# Altium PCB 最小51PCB.PcbDoc
Units mm, origin at the board's own origin, x right, y up, seen from the top; angles counter-clockwise.
Board outline 83.11 x 44.78 mm, 2 copper layers (Top Layer, Bottom Layer); 22 components, 45 nets, 131 pads, 0 vias.
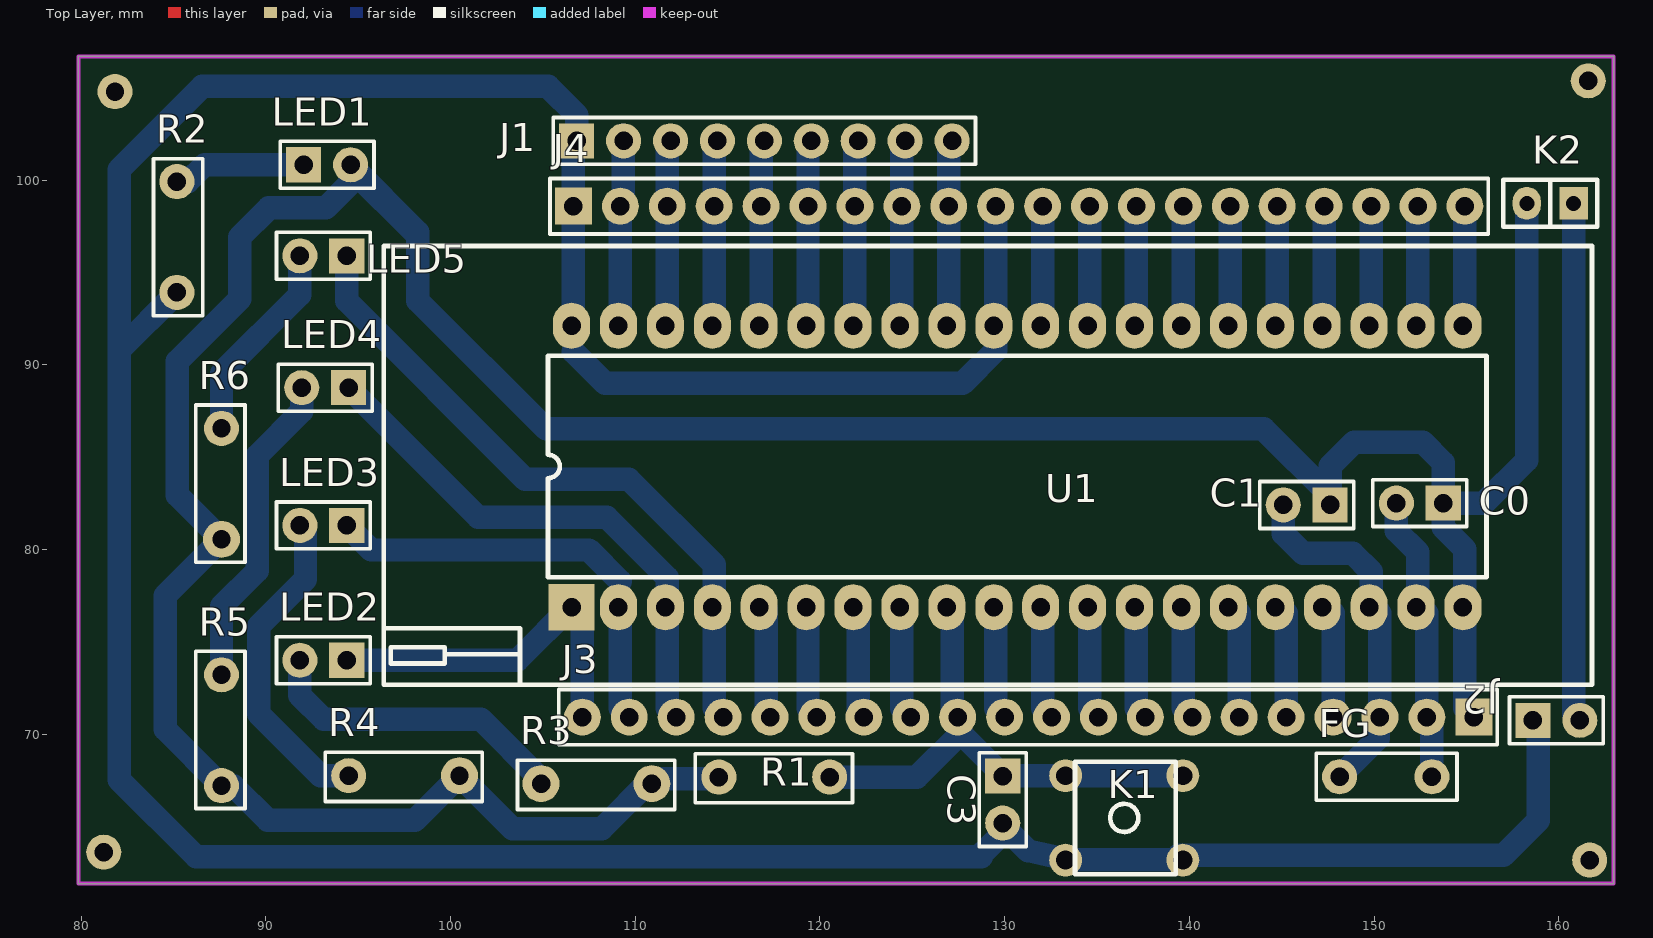
[diagram p0: Top Layer view]
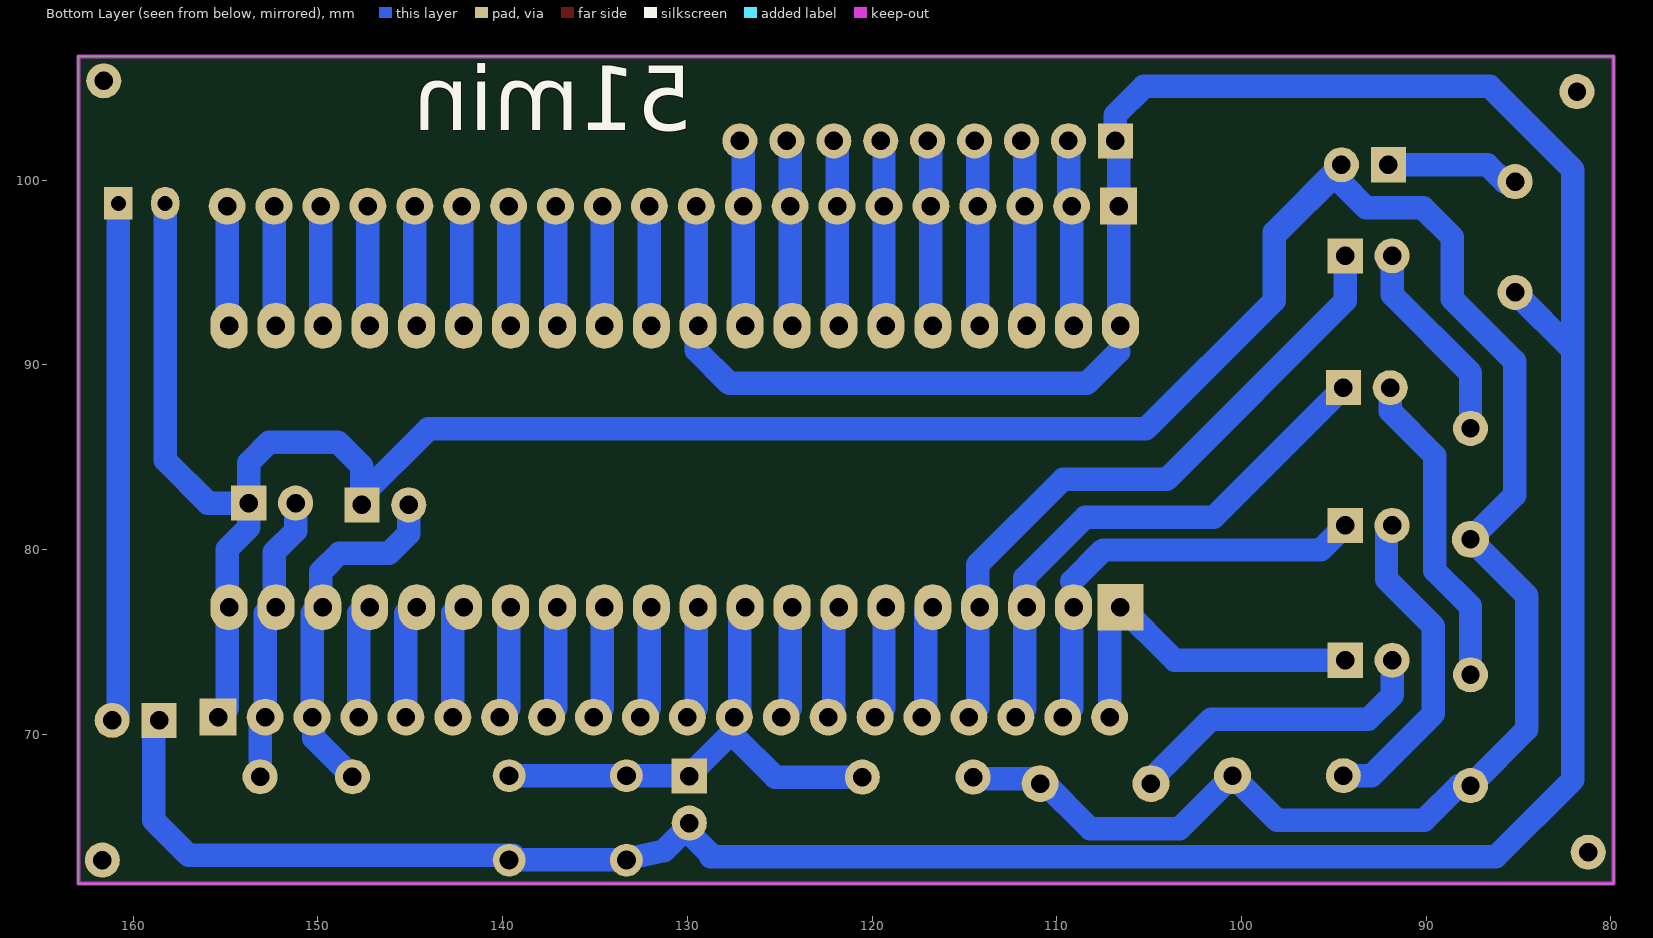
[diagram p1: Bottom Layer view, seen from below]

## Layer stack, top to bottom
Top Solder: solder mask 0.0102, Solder Resist, Dk 3.5
Top Layer: signal copper 0.0356
Dielectric 1: dielectric 0.32, FR-4, Dk 4.8
Bottom Layer: signal copper 0.0356
Bottom Solder: solder mask 0.0102, Solder Resist, Dk 3.5

## Board outline
79.858,61.925 79.858,106.705 162.966,106.705 162.966,61.925

## Design rules (kind name [scope] priority, off if disabled: settings)
Clearance [All] p1: gap=0.254 ignorepadtopadclearanceinfootprint=FALSE except(0: Arc-Hole Track-Hole SMDPad-Hole THPad-Hole Via-Hole Fill-Hole Poly-Hole Region-Hole Text-Hole)
PolygonConnect [All] p1: connectstyle=Relief reliefconductorwidth=0.254 reliefentries=4 polygonreliefangle="90 Angle" airgapwidth=0.254
RoutingVias [All] p1: holewidth=0.711 width=1.27 viastyle="Through Hole" minholewidth=0.711 minwidth=1.27 maxholewidth=0.711 maxwidth=1.27
SolderMaskExpansion [All] p1: expansion=0.102 istentingtop=FALSE
Width [All] p1: maxlimit=1.27 minlimit=1.27 preferedwidth=1.27 minimp=50.000000 maximp=50.000000 favimp=50.000000
30 further rules are at their usual default settings.

## Components (designator, comment, footprint, x,y, rotation, side; value= is the part's Value field where it differs from the comment)
C0 "30pf" CAP 153.746,82.525 r180 top
C1 "30pf" CAP 147.625,82.423 r180 top
C3 "10uf" CAP 129.896,67.742 r270 top
FG "11.0592MHz" JINGZHEN 148.134,67.709 r0 top
J1 "PIN9" PIN9 106.832,102.133 r0 top
J2 "PIN2" CAP 158.598,70.764 r0 top
J3 "PIN20" PIN20_2.54 131.268,70.935 r180 top
J4 "PIN20" PIN20_2.54 130.786,98.595 r0 top
K1 "KEY" AN66 136.474,65.481 r90 top
K2 "KEY" SIP2 160.858,98.806 r180 top
LED1 "LED" CAP 92.05,100.838 r0 top
LED2 "LED" CAP 94.386,74.016 r180 top
LED3 "LED" CAP 94.386,81.314 r180 top
LED4 "LED" CAP 94.488,88.773 r180 top
LED5 "LED" CAP 94.386,95.91 r180 top
R1 "4.7k" RES#1 114.529,67.691 r0 top
R2 "4.7k" RES#1 85.192,93.929 r90 top
R3 "1k" RES#2 104.902,67.335 r0 top
R4 "1k" RES#3 94.488,67.767 r0 top
R5 "1k" RES#1 87.605,73.228 r270 top
R6 "1k" RES#3 87.605,86.563 r270 top
U1 "STC89C52" ZIF40 130.683,84.506 r90 top

## Footprints (in the part's own frame and the unit in brackets; to place one, negate y for a bottom-side part, rotate by r counter-clockwise, add the part's x,y. Pads: shape width x height; smd on the part's side, far side on the other; paste and mask are expansions set on the pad)
AN66 [mil]
  round 70 hole 40: 1(90,125) 1(90,-125) 2(-90,125) 2(-90,-125)
  silkscreen extent -120,-110 120,105, body extent -120,-152 116,152, height 201
CAP [mm]
  rect 1.9x1.9 hole 1: 1(0,0)
  round 1.9 hole 1: 2(2.54,0)
  silkscreen extent -1.27,-1.27 3.81,1.27
JINGZHEN [mm]
  round 1.9 hole 1: 1(0,0) 2(5,0)
  silkscreen extent -1.27,-1.27 6.35,1.27
PIN9 [mm]
  rect 1.9x1.9 hole 1: 1(0,0)
  round 1.9 hole 1: 2(2.54,0) 3(5.08,0) 4(7.62,0) 5(10.16,0) 6(12.7,0) 7(15.24,0) 8(17.78,0) 9(20.32,0)
  silkscreen extent -1.27,-1.27 21.59,1.27
PIN20_2.54 [mm]
  rect 2x2 hole 1: 1(-24.13,0)
  round 2 hole 1: 2(-21.59,0) 3(-19.05,0) 4(-16.51,0) 5(-13.97,0) 6(-11.43,0) 7(-8.89,0) 8(-6.35,0) 9(-3.81,0) 10(-1.27,0) 11(1.27,0) 12(3.81,0) 13(6.35,0) 14(8.89,0) 15(11.43,0) 16(13.97,0) 17(16.51,0) 18(19.05,0) 19(21.59,0) 20(24.13,0)
  silkscreen extent -25.4,-1.5 25.4,1.5, body extent -25.4,-1.24 25.4,1.25, height 8.54
RES#1 [mm]
  round 1.9 hole 1: 1(0,0) 2(6,0)
  silkscreen extent -1.27,-1.4 7.24,1.27
RES#2 [mm]
  round 2 hole 1: 1(0,0) 2(6,0)
  silkscreen extent -1.27,-1.4 7.24,1.27
RES#3 [mm]
  round 1.9 hole 1: 1(0,0)
  round 2 hole 1: 2(6,0)
  silkscreen extent -1.27,-1.4 7.24,1.27
SIP2 [mil]
  rect 60x70 hole 32: 1(2,2)
  oval 60x70 hole 32: 2(102,2)
  silkscreen extent -48,-48 152,52
ZIF40 [mm]
  rect 2.5x2.5 hole 1: 1(-7.62,24.13)
  oval 2.5x2 hole 1: 2(-7.62,21.59) 3(-7.62,19.05) 4(-7.62,16.51) 5(-7.62,13.97) 6(-7.62,11.43) 7(-7.62,8.89) 8(-7.62,6.35) 9(-7.62,3.81) 10(-7.62,1.27) 11(-7.62,-1.27) 12(-7.62,-3.81) 13(-7.62,-6.35) 14(-7.62,-8.89) 15(-7.62,-11.43) 16(-7.62,-13.97) 17(-7.62,-16.51) 18(-7.62,-19.05) 19(-7.62,-21.59) 20(-7.62,-24.13) 21(7.62,-24.13) 22(7.62,-21.59) 23(7.62,-19.05) 24(7.62,-16.51) 25(7.62,-13.97) 26(7.62,-11.43) 27(7.62,-8.89) 28(7.62,-6.35) 29(7.62,-3.81) 30(7.62,-1.27) 31(7.62,1.27) 32(7.62,3.81) 33(7.62,6.35) 34(7.62,8.89) 35(7.62,11.43) 36(7.62,13.97) 37(7.62,16.51) 38(7.62,19.05) 39(7.62,21.59) 40(7.62,24.13)
  silkscreen extent -11.81,-31.12 11.94,34.29, body extent -11.87,-31.2 12,45.99, height 11

## Part data
C0 C1: library part CAP
C3: library part CAP_JIXING
FG: library part JINGZHEN
R1 R2 R3 R4 R5 R6: library part R

## Free pads (board coordinates)
  round 1.9 hole 1: 0(81.839,104.8) 1(81.229,63.627) 2(161.595,105.385) 3(161.671,63.195)

## Nets (pads, with @x,y where several pads share a name; then routed paths per layer and width w, separated by ;. In a path a pad name is that pad's centre, name@x,y a point inside that pad or via, vN(x,y) a via of type N, cw(c..) or ccw(c..) an arc to the next point about the centre after c; other vN are vias at no path point)
GND: C0.1 C1.1 J3.1 K2.2 LED1.2 R1.1 R3.2 R4.2 R5.2 R6.2 U1.20 | length 184.6
  Bottom Layer w1.27: LED1.2 98.234,97.193 98.234,96.99 ; R1.1@114.427,67.589 110.877,67.589 108.184,64.897 103.358,64.897 R4.2 98.075,65.354 90.119,65.354 88.245,67.228 R5.2 84.557,70.276 84.557,77.515 R6.2 85.217,82.951 85.217,90.195 88.595,93.574 88.595,96.926 90.17,98.501 93.243,98.501 94.59,99.847 94.59,100.635 98.234,96.99 ; R1.1@114.529,67.412 R1.1 ; C1.1 C1.1@147.625,82.931 ; J3.1 154.916,71.417 154.916,80.034 153.746,81.204 C0.1 ; K2.2 158.267,84.836 155.956,82.525 C0.1 ; 98.234,96.99 98.234,93.485 105.181,86.538 144.018,86.538 C1.1@147.625,82.931 ; C1.1@147.625,82.931 147.625,84.531 148.92,85.827 152.629,85.827 153.746,84.709 C0.1
NetJ2_2: J2.2 K2.1 | length 28.1
  Bottom Layer w1.27: K2.1 160.807,71.095 J2.2
NetJ3_4: J3.4 U1.17 | length 6.3
  Bottom Layer w1.27: U1.17@147.296,77.056 147.778,76.574 J3.4
NetJ3_5: J3.5 U1.16 | length 6.3
  Bottom Layer w1.27: U1.16@144.756,77.056 145.238,76.574 J3.5
NetJ3_6: J3.6 U1.15 | length 6.3
  Bottom Layer w1.27: U1.15@142.216,77.056 142.698,76.574 J3.6
NetJ3_7: J3.7 U1.14 | length 6.3
  Bottom Layer w1.27: U1.14@139.676,77.056 139.676,71.417 J3.7
NetJ3_8: J3.8 U1.13 | length 6.3
  Bottom Layer w1.27: U1.13@137.136,77.056 137.136,71.417 J3.8
NetJ3_9: J3.9 U1.12 | length 6.3
  Bottom Layer w1.27: U1.12@134.596,77.056 134.596,71.417 J3.9
NetJ3_10: J3.10 U1.11 | length 6.3
  Bottom Layer w1.27: U1.11@132.056,77.056 132.056,71.417 J3.10
NetJ3_11: J3.11 U1.10 | length 6.3
  Bottom Layer w1.27: U1.10@129.516,77.056 129.516,71.417 J3.11
NetJ3_13: J3.13 U1.8 | length 6.3
  Bottom Layer w1.27: U1.8@124.436,77.056 124.436,71.417 J3.13
NetJ3_14: J3.14 U1.7 | length 6.3
  Bottom Layer w1.27: U1.7@121.896,77.056 122.072,76.88 122.072,71.241 J3.14
NetJ3_15: J3.15 U1.6 | length 6.3
  Bottom Layer w1.27: U1.6@119.356,77.056 119.356,71.417 J3.15
NetJ3_16: J3.16 U1.5 | length 6.3
  Bottom Layer w1.27: U1.5@116.816,77.056 117.094,76.778 117.094,71.139 J3.16
NetJ4_11: J4.11 U1.30 | length 6.3
  Bottom Layer w1.27: U1.30@132.056,92.296 J4.11
NetJ4_12: J4.12 U1.29 | length 6.3
  Bottom Layer w1.27: U1.29@134.596,92.296 J4.12
NetJ4_13: J4.13 U1.28 | length 6.3
  Bottom Layer w1.27: U1.28@137.136,92.296 J4.13
NetJ4_14: J4.14 U1.27 | length 6.3
  Bottom Layer w1.27: U1.27@139.676,92.296 J4.14
NetJ4_15: J4.15 U1.26 | length 6.3
  Bottom Layer w1.27: U1.26@142.216,92.296 J4.15
NetJ4_16: J4.16 U1.25 | length 6.3
  Bottom Layer w1.27: U1.25@144.756,92.296 J4.16
NetJ4_17: J4.17 U1.24 | length 6.3
  Bottom Layer w1.27: U1.24@147.296,92.296 J4.17
NetJ4_18: J4.18 U1.23 | length 6.3
  Bottom Layer w1.27: U1.23@149.836,92.296 J4.18
NetJ4_19: J4.19 U1.22 | length 6.3
  Bottom Layer w1.27: U1.22@152.376,92.296 J4.19
NetJ4_20: J4.20 U1.21 | length 6.3
  Bottom Layer w1.27: U1.21@154.916,92.296 J4.20
NetLED1_1: LED1.1 R2.2 | length 7.2
  Bottom Layer w1.27: R2.2 85.781,99.929 86.69,100.838 LED1.1
NetLED2_2: LED2.2 R3.1 | length 16.8
  Bottom Layer w1.27: LED2.2 91.846,72.111 93.142,70.815 101.651,70.815 R3.1@104.877,67.589
NetLED3_2: LED3.2 R4.1 | length 17.6
  Bottom Layer w1.27: LED3.2 92.151,81.009 92.151,78.395 89.611,75.855 89.611,71.12 92.964,67.767 R4.1
NetLED4_2: LED4.2 R5.1 | length 17.3
  Bottom Layer w1.27: R5.1 87.605,76.937 89.535,78.867 89.535,85.09 91.948,87.503 LED4.2
NetLED5_2: LED5.2 R6.1 | length 11.1
  Bottom Layer w1.27: R6.1 87.605,89.56 91.846,93.802 LED5.2
P0.0: J1.2 J4.2 U1.39 | length 10.2
  Bottom Layer w1.27: U1.39@109.196,92.296 J4.2 109.347,98.747 J1.2@109.347,102.43
P0.1: J1.3 J4.3 U1.38 | length 10
  Bottom Layer w1.27: U1.38@111.736,92.296 J4.3 J1.3@111.736,102.278
P0.2: J1.4 J4.4 U1.37 | length 10
  Bottom Layer w1.27: U1.37@114.276,92.296 J4.4 J1.4@114.276,102.278
P0.3: J1.5 J4.5 U1.36 | length 10
  Bottom Layer w1.27: U1.36@116.816,92.296 J4.5 J1.5@116.816,102.278
P0.4: J1.6 J4.6 U1.35 | length 10
  Bottom Layer w1.27: U1.35@119.356,92.296 J4.6 J1.6@119.356,102.278
P0.5: J1.7 J4.7 U1.34 | length 10
  Bottom Layer w1.27: U1.34@121.896,92.296 J4.7 J1.7@121.896,102.278
P0.6: J1.8 J4.8 U1.33 | length 10
  Bottom Layer w1.27: U1.33@124.436,92.296 J4.8 J1.8@124.436,102.278
P0.7: J1.9 J4.9 U1.32 | length 10
  Bottom Layer w1.27: U1.32@126.976,92.296 J4.9 J1.9@126.976,102.278
P1.0: J3.20 LED2.1 U1.1 | length 19.9
  Bottom Layer w1.27: LED2.1 103.615,74.016 106.656,77.056 107.138,76.574 J3.20
P1.1: J3.19 LED3.1 U1.2 | length 22.4
  Bottom Layer w1.27: LED3.1 95.717,79.983 107.494,79.983 109.195,78.283 ; U1.2@109.196,77.056 109.196,71.417 J3.19
P1.2: J3.18 LED4.1 U1.3 | length 29.3
  Bottom Layer w1.27: LED4.1 101.498,81.763 108.458,81.763 111.736,78.485 111.736,71.417 J3.18
P1.3: J3.17 LED5.1 U1.4 | length 36.8
  Bottom Layer w1.27: LED5.1 94.386,93.472 104.038,83.82 109.652,83.82 114.276,79.196 U1.4@114.276,76.989 ; U1.4 U1.4@114.276,76.989 ; J3.17 114.276,71.417 U1.4@114.276,76.989
RST: C3.1 J3.12 K1.1 R1.2 U1.9 | length 28.4
  Bottom Layer w1.27: R1.2 125.247,67.691 127.458,69.902 J3.12@127.458,70.23 ; U1.9@126.976,77.056 127.152,76.88 127.152,71.241 J3.12 J3.12@127.458,70.23 ; C3.1@130.175,67.513 J3.12@127.458,70.23 ; C3.1@130.302,67.767 133.299,67.767 K1.1@139.649,67.767
VCC: C3.2 J1.1 J2.1 J4.1 J4.10 K1.2 R2.1 U1.31 U1.40 | length 194.5
  Bottom Layer w1.27: R2.1 82.067,90.805 ; U1.40 106.656,92.229 J4.1 106.656,101.957 J1.1 106.832,103.53 105.283,105.08 86.567,105.08 82.067,100.58 82.067,90.805 ; 106.656,90.724 108.378,89.002 127.72,89.002 129.516,90.798 J4.10 ; 128.727,63.373 86.233,63.373 82.067,67.539 82.067,90.805 ; 128.854,63.627 130.099,64.872 131.267,63.703 133.401,63.221 K1.2@139.751,63.221 ; K1.2@139.421,63.449 156.997,63.449 158.89,65.341 158.89,70.472 J2.1
XTAL1: C0.2 FG.2 J3.2 U1.19 | length 15.9
  Bottom Layer w1.27: C0.2 151.206,81.026 152.376,79.856 152.376,77.056 152.858,76.574 J3.2 153.134,70.659 FG.2 FG.2@153.314,67.529
XTAL2: C1.2 FG.1 J3.3 U1.18 | length 19.5
  Bottom Layer w1.27: C1.2 145.085,80.874 146.152,79.807 148.844,79.807 149.836,78.815 149.836,77.056 150.318,76.574 J3.3 ; FG.1@148.336,67.507 FG.1 150.217,69.792 J3.3@150.217,70.833

## Keep-outs
Keep-Out Layer:
  lines w0.2: 79.858,61.925 162.966,61.925 162.966,106.705 79.858,106.705 79.858,94.81 79.858,71.019 79.858,61.925

## Silkscreen, mask and mechanical layers (free items; w line width, h text height)
Bottom Overlay:
  text "51min" at 129.718,101.549 h6